# EAGLE board 009pcb3_12mil (EAGLE 9.6.2)
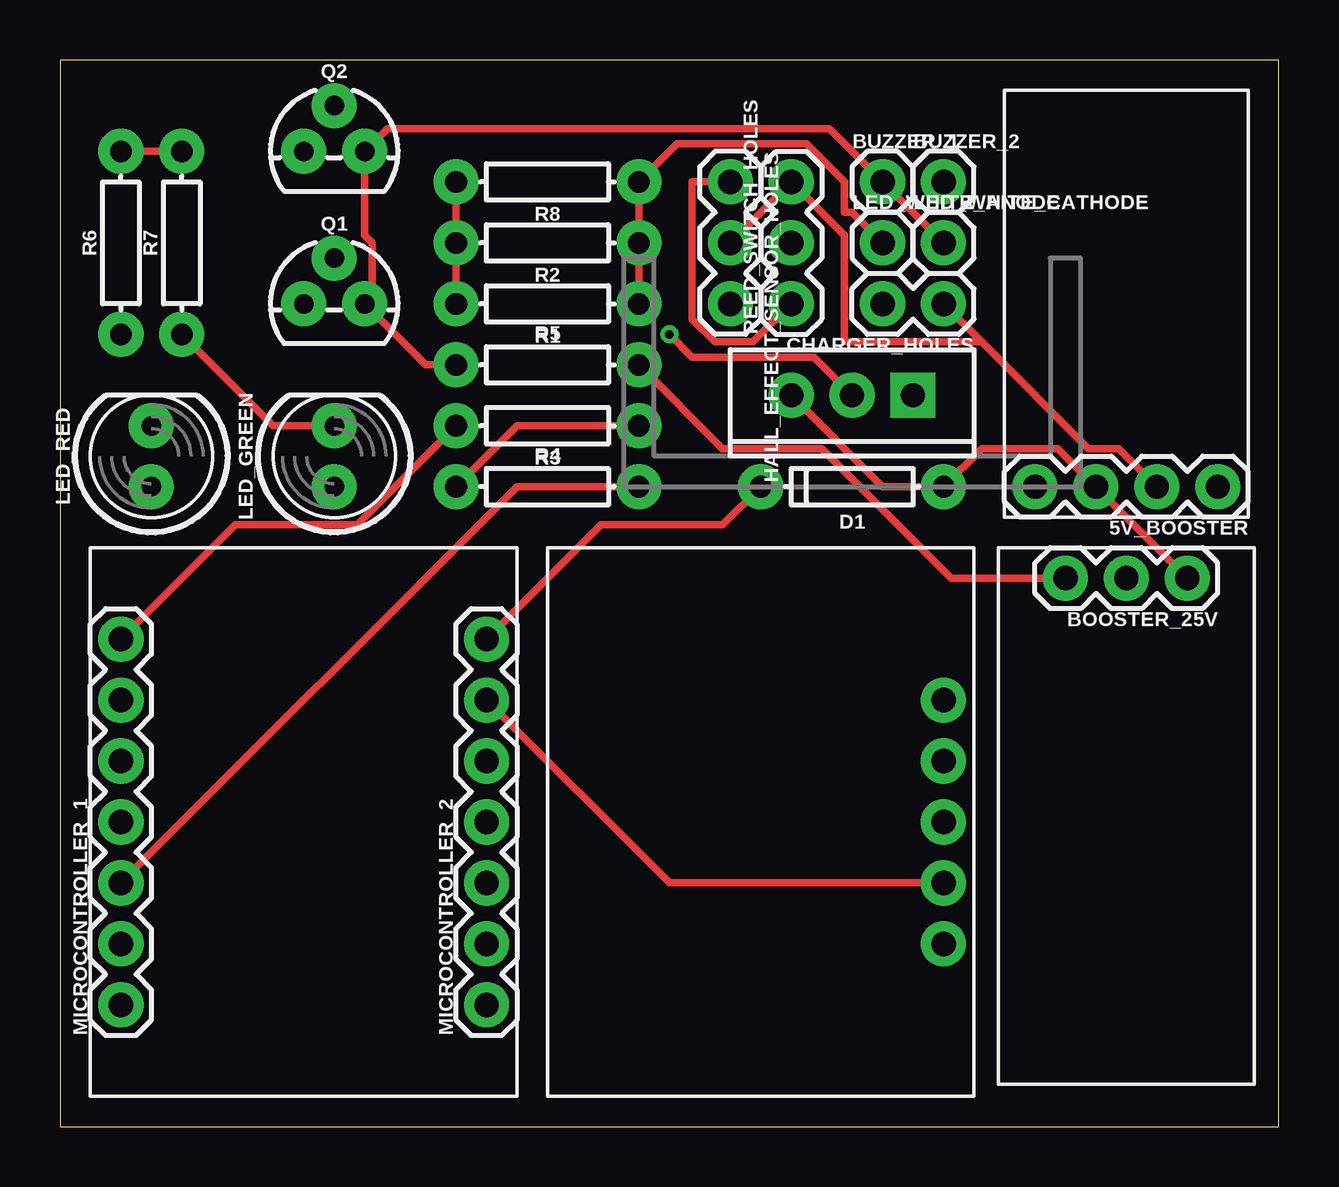
[diagram p0: board, top side]
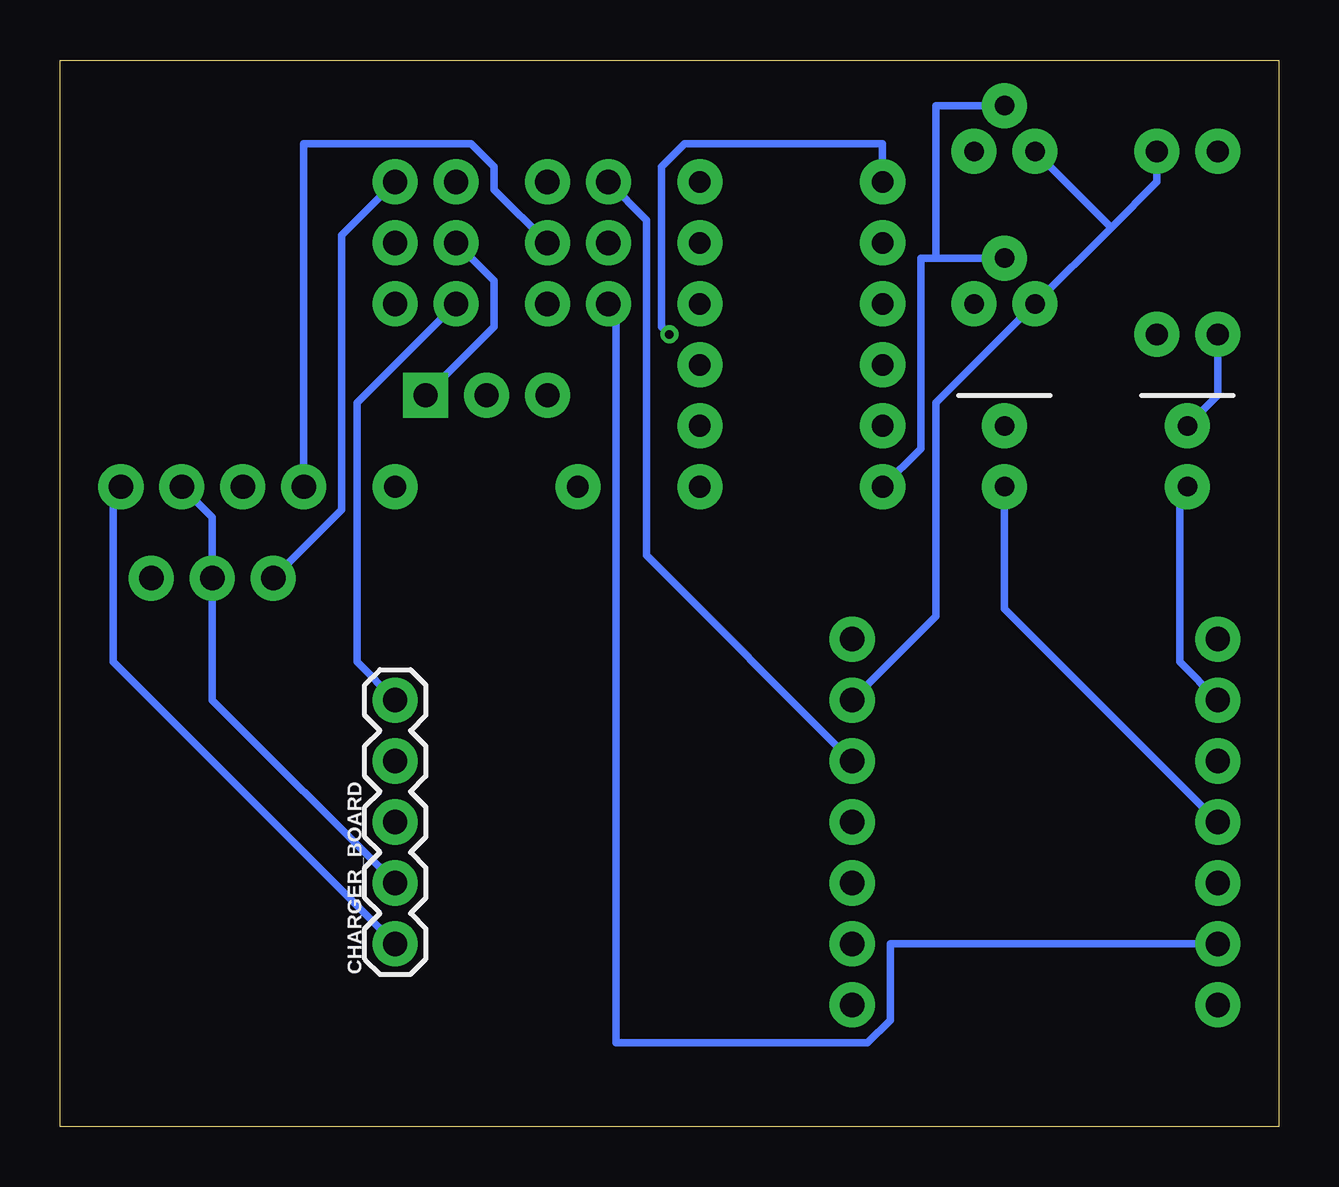
[diagram p1: board, bottom side, seen from below]

Size 50.8 x 44.45 mm. Coordinates in mm from the lower left corner, seen from the top.
Outline: 0,0 50.8,0 50.8,44.45 0,44.45 0,0
Copper layers (1*16): Top 0.035mm / dielectric 1.5mm / Bottom 0.035mm
Design rules "default *": minimum track width 12mil, minimum drill 0.35mm, track to track 12mil, track to pad 12mil, pad to pad 12mil, via to via 12mil, smd to smd 12mil, copper to edge 40mil, drill to drill 6mil, minimum pad ring 10mil, minimum via ring 8mil, stop-mask expansion 4mil, vias tented up to drill 0mil, thermal gap 10mil

## Footprints (pad centres in the part's own frame; a part is rotated, then mirrored left to right if it is on the bottom)
1X04 = drill 1.016 pad 1.88: 1 0,0; 2 2.54,0; 3 5.08,0; 4 7.62,0
1X03 = drill 1.016 pad 1.88: 1 0,0; 2 2.54,0; 3 5.08,0
1X01 = drill 1.016 pad 1.88: 1 0,0
1X05 = drill 1.016 pad 1.88: 1 0,0; 2 2.54,0; 3 5.08,0; 4 7.62,0; 5 10.16,0
1X02 = drill 1.016 pad 1.88: 1 0,0; 2 2.54,0
DIODE-1N4148 = drill 0.9 pad 1.88: A -3.81,0; C 3.81,0
LED_5MM = drill 0.813 pad 1.88: A -1.27,0; K 1.27,0
1X07 = drill 1.016 pad 1.88: 1 0,0; 2 2.54,0; 3 5.08,0; 4 7.62,0; 5 10.16,0; 6 12.7,0; 7 15.24,0
TO-92 = drill 0.813 pad 1.88: 1 -1.27,0; 2 0,1.905; 3 1.27,0
AXIAL-0.3 = drill 0.9 pad 1.88: P$1 -3.81,0; P$2 3.81,0
TO220-ADJ = drill 1 pad 1.88 square: ADJ -2.54,0 | drill 1 pad 1.88: IN 2.54,0; OUT 0,0

## Placement (x,y rotation side)
5V_BOOSTER  [1X04]  48.26,26.67 180 top
BOOSTER_25V  [1X03]  46.99,22.86 180 top
BUZZER_1  [1X01]  34.29,39.37 0 top
BUZZER_2  [1X01]  36.83,39.37 0 top
CHARGER_BOARD  [1X05]  36.83,7.62 90 bottom
CHARGER_HOLES  [1X02]  36.83,34.29 180 top
D1  200mA/100V/1V  [DIODE-1N4148]  33.02,26.67 180 top
HALL_EFFECT_SENSOR_HOLES  [1X03]  27.94,39.37 270 top
LED_GREEN  [LED_5MM]  11.43,27.94 90 top
LED_RED  [LED_5MM]  3.81,27.94 90 top
LED_WHITE_ANODE  [1X01]  34.29,36.83 0 top
LED_WHITE_CATHODE  [1X01]  36.83,36.83 0 top
MICROCONTROLLER_1  [1X07]  2.54,5.08 90 top
MICROCONTROLLER_2  [1X07]  17.78,5.08 90 top
Q1  600mA/30V  [TO-92]  11.43,34.29 0 top
Q2  600mA/30V  [TO-92]  11.43,40.64 0 top
R1  12  [AXIAL-0.3]  20.32,34.29 180 top
R2  12  [AXIAL-0.3]  20.32,36.83 180 top
R3  54  [AXIAL-0.3]  20.32,29.21 180 top
R4  54  [AXIAL-0.3]  20.32,26.67 0 top
R5  1k  [AXIAL-0.3]  20.32,31.75 0 top
R6  56  [AXIAL-0.3]  2.54,36.83 90 top
R7  10  [AXIAL-0.3]  5.08,36.83 90 top
R8  12  [AXIAL-0.3]  20.32,39.37 180 top
REED_SWITCH_HOLES  [1X03]  30.48,34.29 90 top
U1  V_REG_317SINK  [TO220-ADJ]  33.02,30.48 180 top

## Library data of the parts
5V_BOOSTER = SparkFun-Connectors; PROD_ID: CONN-09696
BOOSTER_25V BUZZER_1 BUZZER_2 CHARGER_BOARD CHARGER_HOLES HALL_EFFECT_SENSOR_HOLES LED_WHITE_ANODE LED_WHITE_CATHODE MICROCONTROLLER_1 MICROCONTROLLER_2 REED_SWITCH_HOLES = SparkFun-Connectors
D1 = SparkFun-DiscreteSemi; PROD_ID: DIO-08378
LED_GREEN LED_RED = SparkFun-LED
Q1 Q2 = SparkFun-DiscreteSemi; PROD_ID: TRANS-08447
R1-R4 R6-R8 = SparkFun-Resistors; PROD_ID: RES-12180
R5 = SparkFun-Resistors; PROD_ID: RES-12182
U1 = SparkFun-IC-Power

## Nets
3V: HALL_EFFECT_SENSOR_HOLES.1 MICROCONTROLLER_2.5 REED_SWITCH_HOLES.1
5V: 5V_BOOSTER.3 BOOSTER_25V.1 D1.A U1.IN
5V_CHARGER: CHARGER_BOARD.5 CHARGER_HOLES.2
A0: MICROCONTROLLER_1.7 R3.P$2
A1: LED_RED.A MICROCONTROLLER_1.6
A2: MICROCONTROLLER_1.5
A3: LED_GREEN.A MICROCONTROLLER_1.4
ADJUST: LED_WHITE_ANODE.1 R1.P$1 R2.P$1 R8.P$1 U1.ADJ
BASE: Q1.2 Q2.2 R3.P$1 R4.P$1
BAT: 5V_BOOSTER.1 CHARGER_BOARD.1
COLLECTOR: BUZZER_1.1 LED_WHITE_CATHODE.1 Q1.3 Q2.3 R5.P$1
D+: CHARGER_BOARD.3
D-: CHARGER_BOARD.4
EN: 5V_BOOSTER.4 REED_SWITCH_HOLES.2
GND: 5V_BOOSTER.2 BOOSTER_25V.2 CHARGER_BOARD.2 CHARGER_HOLES.1 HALL_EFFECT_SENSOR_HOLES.2 MICROCONTROLLER_2.6 Q1.1 Q2.1 R6.P$2 R7.P$2 REED_SWITCH_HOLES.3
MI: MICROCONTROLLER_2.3
MO: MICROCONTROLLER_2.4
N$1: LED_RED.K R6.P$1
N$3: LED_GREEN.K R7.P$1
N$6: D1.C MICROCONTROLLER_2.7
RX: MICROCONTROLLER_2.1
SCK: MICROCONTROLLER_2.2
SCL: HALL_EFFECT_SENSOR_HOLES.3 MICROCONTROLLER_1.2
SDA: MICROCONTROLLER_1.3 R4.P$2
TX: MICROCONTROLLER_1.1
VOUT_BOOSTER: BOOSTER_25V.3 BUZZER_2.1 R5.P$2
VOUT_LM317: R1.P$2 R2.P$2 R8.P$2 U1.OUT

## Tracks (layer width: path | path; a pad name or v marks a point on that pad's centre or on a via)
3V
  Top 0.305: REED_SWITCH_HOLES.1 28.89,32.7 27.3,32.7 26.35,33.66 26.35,39.37 HALL_EFFECT_SENSOR_HOLES.1
  Bottom 0.305: MICROCONTROLLER_2.5 26.35,23.81 26.35,37.78 HALL_EFFECT_SENSOR_HOLES.1
5V
  Top 0.305: BOOSTER_25V.1 5V_BOOSTER.3 41.59,28.26 38.42,28.26 D1.A 34.29,26.67 U1.IN
5V_CHARGER
  Bottom 0.305: CHARGER_BOARD.5 38.42,19.37 38.42,30.16 CHARGER_HOLES.2
A0
  Top 0.305: MICROCONTROLLER_1.7 7.3,25.08 12.38,25.08 R3.P$2
A1
  Bottom 0.305: MICROCONTROLLER_1.6 4.13,19.37 4.13,26.35 LED_RED.A
A3
  Bottom 0.305: MICROCONTROLLER_1.4 11.43,21.59 LED_GREEN.A
ADJUST
  Top 0.305: R1.P$1 R2.P$1 R8.P$1 25.72,40.96 31.11,40.96 32.7,39.37 32.7,38.1 33.02,38.1 LED_WHITE_ANODE.1
  Bottom 0.305: U1.ADJ 32.7,33.34 32.7,35.24 LED_WHITE_ANODE.1
BASE
  Top 0.305: R4.P$1 19.05,29.21 R3.P$1
  Bottom 0.305: 14.29,36.2 14.92,36.2 14.92,28.26 R4.P$1 | 14.29,36.2 Q1.2 | Q2.2 14.29,42.55 14.29,36.2
BAT
  Bottom 0.305: CHARGER_BOARD.1 48.58,19.37 48.58,26.35 5V_BOOSTER.1
COLLECTOR
  Top 0.305: LED_WHITE_CATHODE.1 BUZZER_1.1 32.07,41.59 13.65,41.59 Q2.3 12.7,37.15 13.02,36.83 13.02,34.29 Q1.3 15.24,31.75 R5.P$1
EN
  Bottom 0.305: REED_SWITCH_HOLES.2 32.7,39.05 32.7,40.01 33.66,40.96 40.64,40.96 5V_BOOSTER.4
GND
  Top 0.305: R7.P$2 R6.P$2 | HALL_EFFECT_SENSOR_HOLES.2 REED_SWITCH_HOLES.3 32.7,37.15 32.7,32.7 38.42,32.7 | MICROCONTROLLER_2.6 25.4,10.16 CHARGER_BOARD.2 | 38.42,32.7 42.86,28.26 44.13,28.26 5V_BOOSTER.2 | 38.42,32.7 CHARGER_HOLES.1
  Bottom 0.305: 6.99,37.47 5.08,39.37 R7.P$2 | 6.99,37.47 Q1.1 14.29,30.16 14.29,21.27 MICROCONTROLLER_2.6 | 6.99,37.47 Q2.1 | CHARGER_BOARD.2 44.45,17.78 BOOSTER_25V.2 44.45,25.4 5V_BOOSTER.2
N$1
  Bottom 0.305: LED_RED.K 2.54,30.48 R6.P$1
N$3
  Top 0.305: R7.P$1 8.89,29.21 LED_GREEN.K
N$6
  Top 0.305: MICROCONTROLLER_2.7 22.54,25.08 27.62,25.08 D1.C
SCL
  Bottom 0.305: MICROCONTROLLER_1.2 16.19,7.62 16.19,4.45 17.14,3.49 27.62,3.49 27.62,33.97 HALL_EFFECT_SENSOR_HOLES.3
SDA
  Top 0.305: MICROCONTROLLER_1.3 19.05,26.67 R4.P$2
VOUT_BOOSTER
  Top 0.305: R5.P$2 27.62,28.26 31.75,28.26 37.15,22.86 BOOSTER_25V.3
  Bottom 0.305: BUZZER_2.1 39.05,37.15 39.05,25.72 BOOSTER_25V.3
VOUT_LM317  (via drill 0.35)
  Top 0.305: R1.P$2 R2.P$2 R8.P$2 | U1.OUT 31.43,32.07 26.35,32.07 v25.4,33.02
  Bottom 0.305: v25.4,33.02 25.72,33.34 25.72,40.01 24.77,40.96 16.51,40.96 R8.P$2